# Altium PCB PCB_RX.PcbDoc
Units mm, origin at the board's own origin, x right, y up, seen from the top; angles counter-clockwise.
Board outline 85 x 54.6 mm, 2 copper layers (Top Layer, Bottom Layer); 68 components, 39 nets, 246 pads, 93 vias.
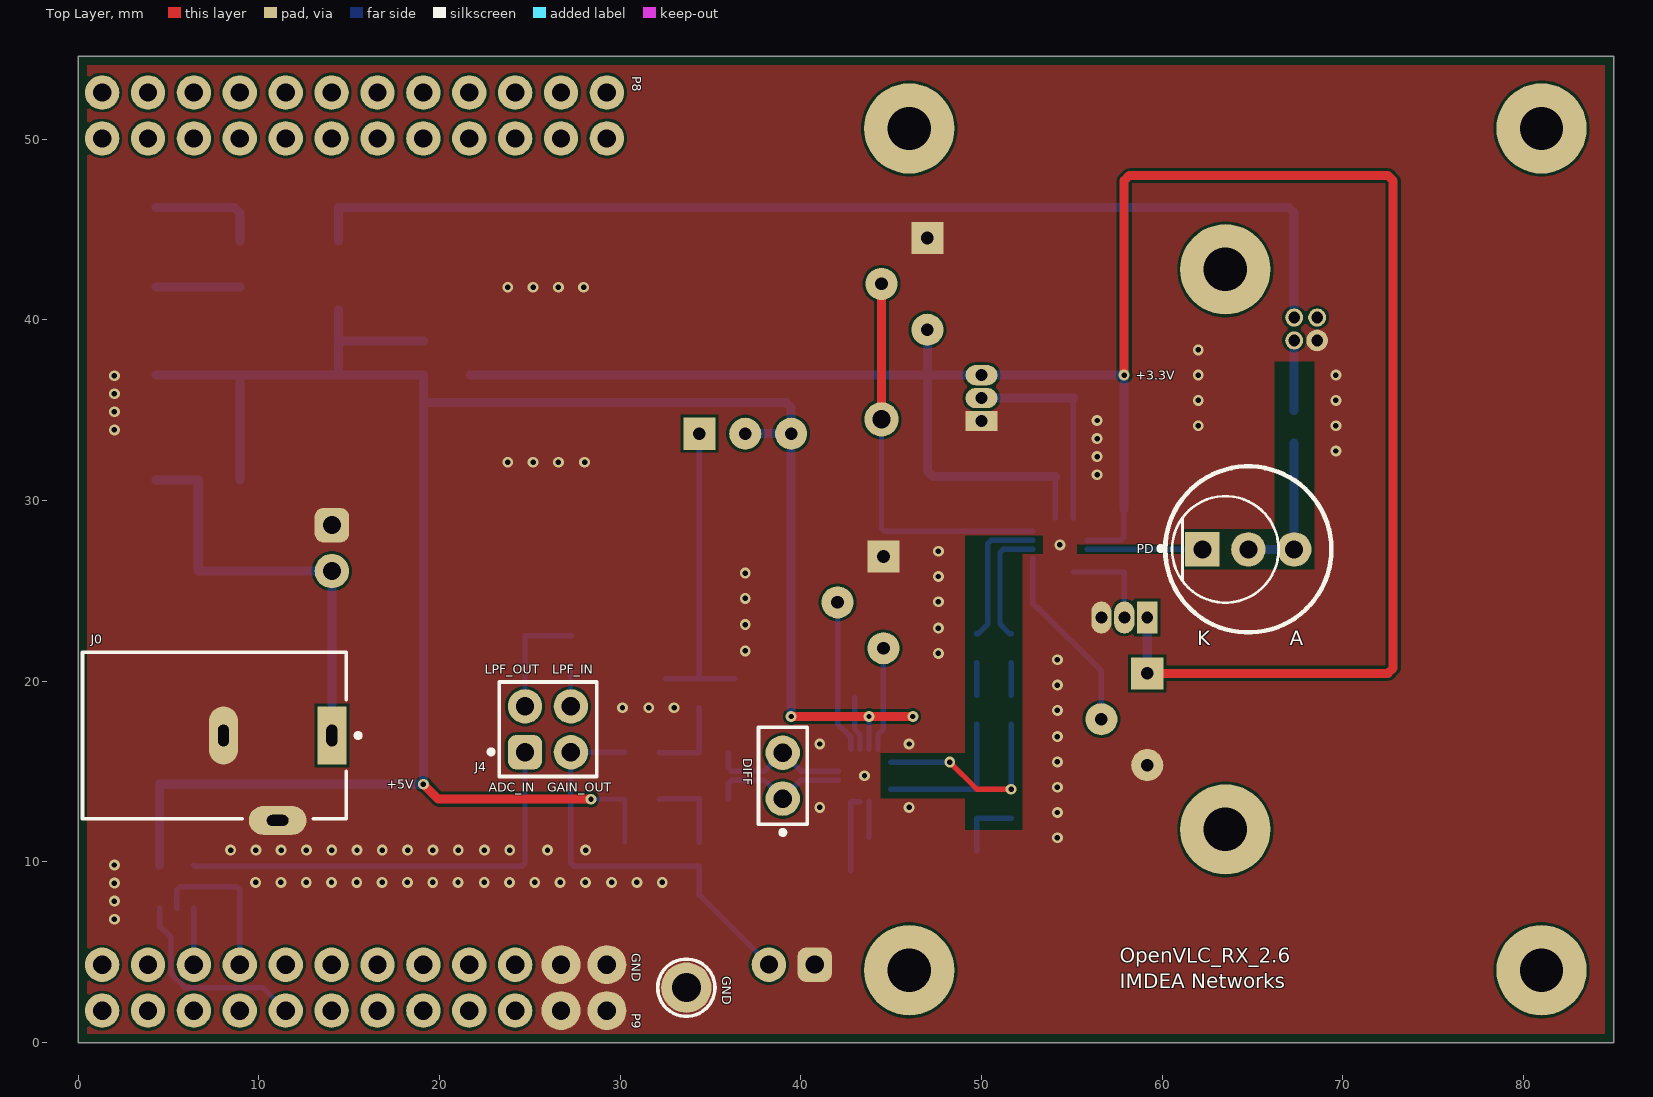
[diagram p0: Top Layer view]
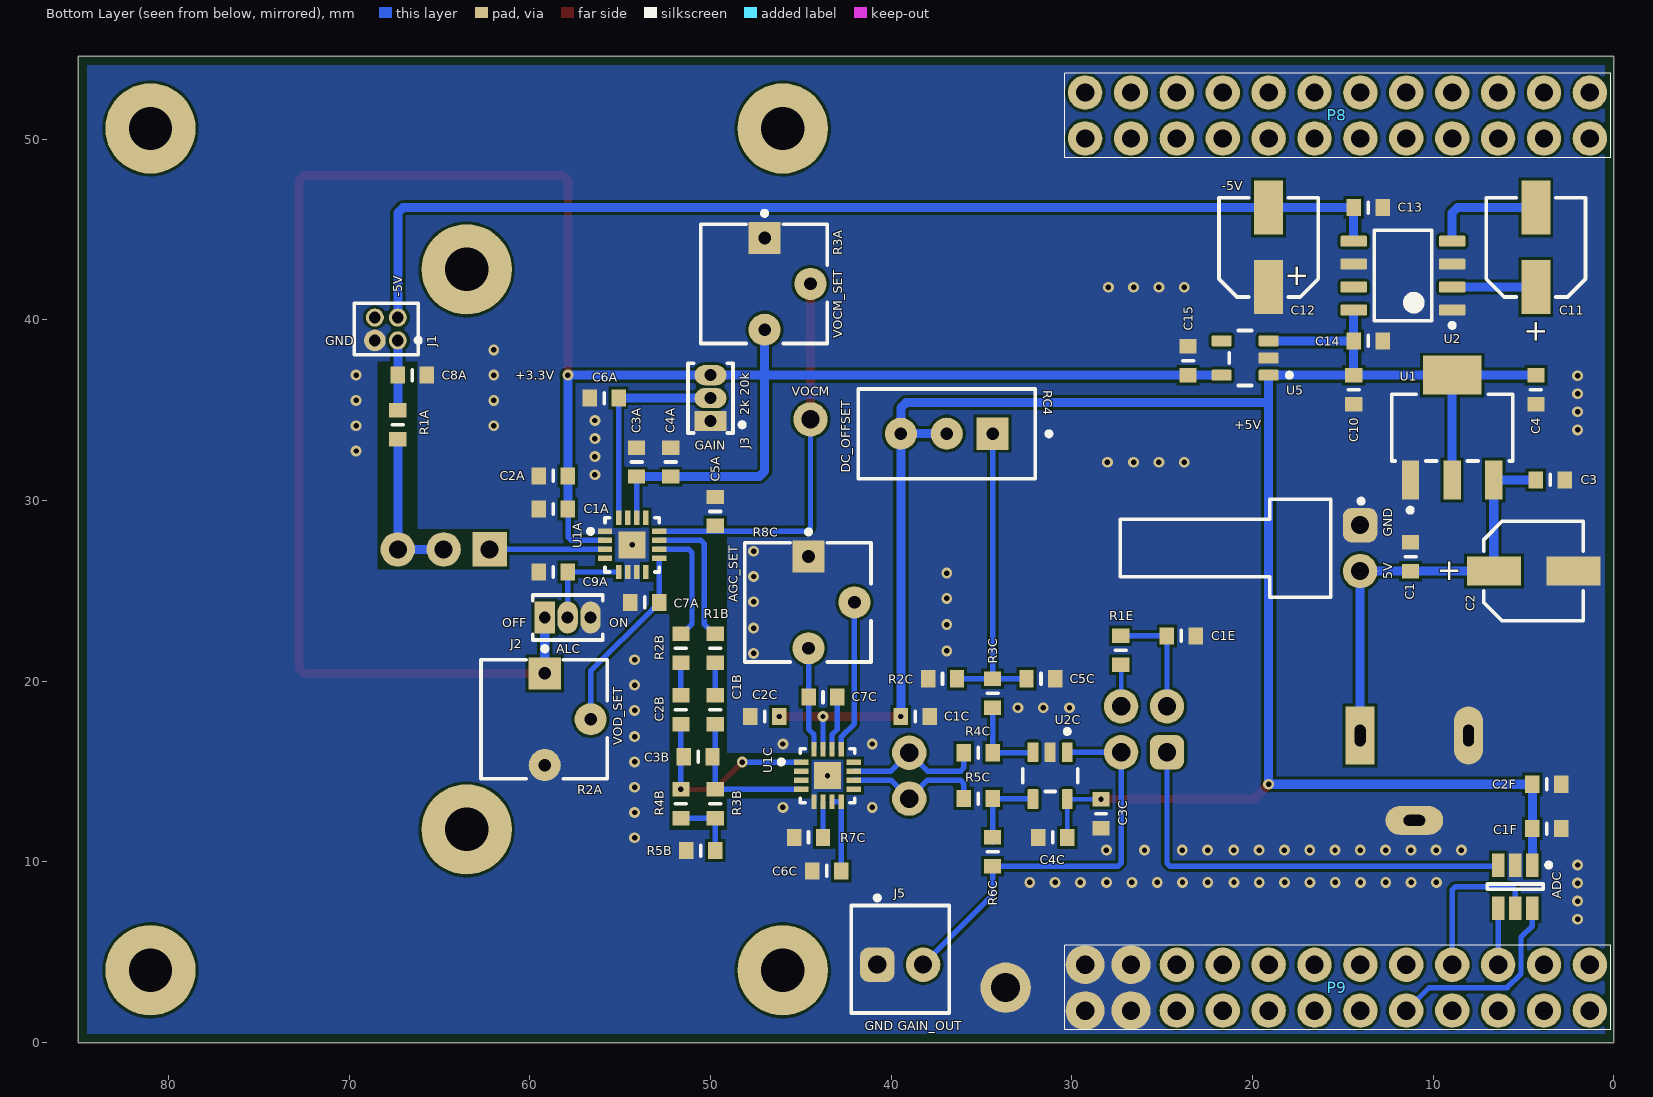
[diagram p1: Bottom Layer view, seen from below]
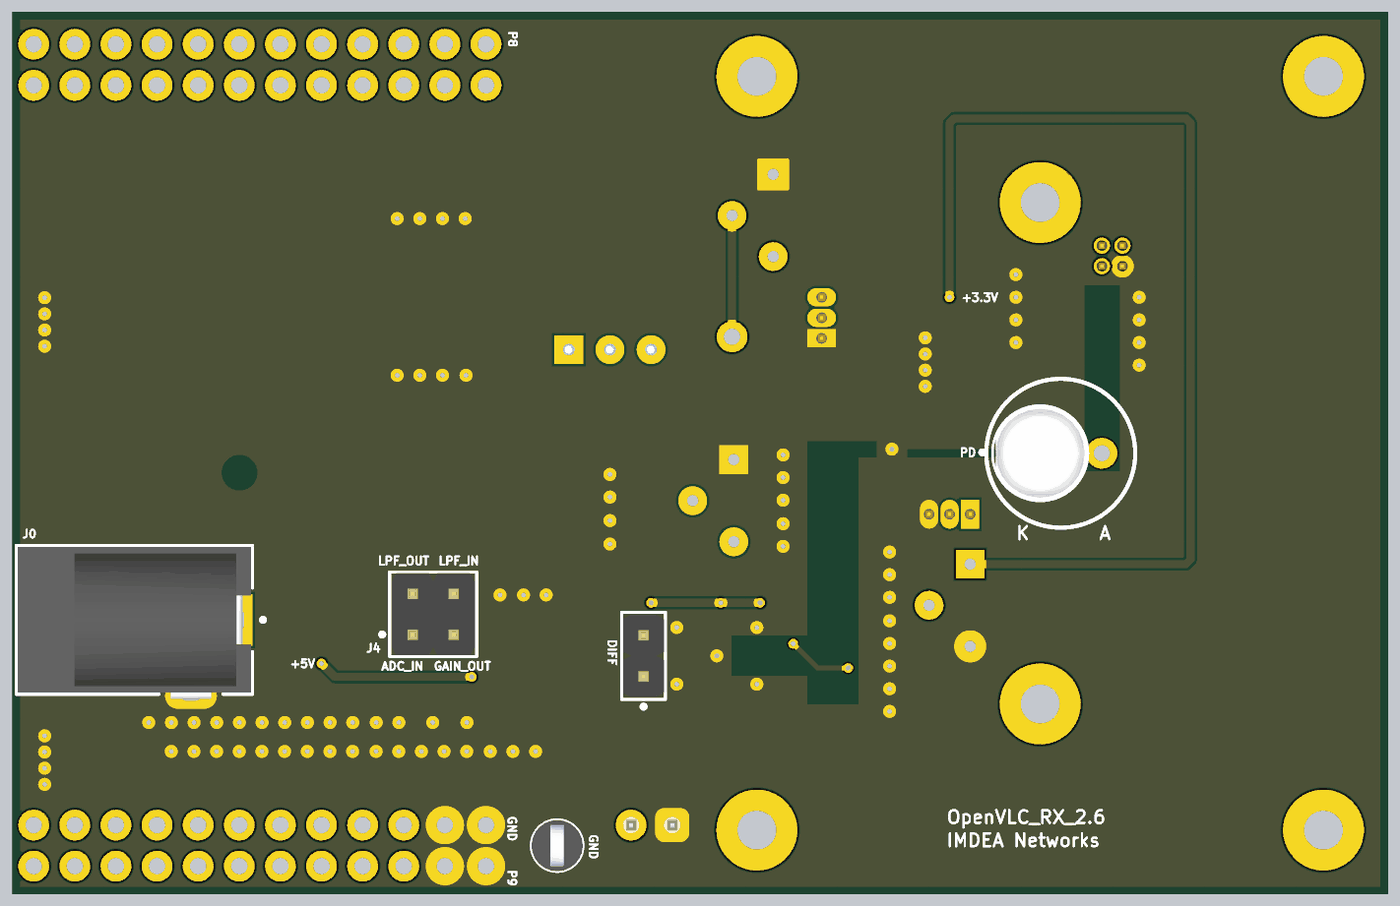
[diagram p2: 3D render of the assembled board from above, using the file's embedded part models]

## Layer stack, top to bottom
Top Solder: solder mask 0.0102, Solder Resist, Dk 3.5
Top Layer: signal copper 0.0356
Dielectric1: dielectric 0.32, FR-4, Dk 4.8
Bottom Layer: signal copper 0.0356
Bottom Solder: solder mask 0.0102, Solder Resist, Dk 3.5

## Board outline
0,0 85,0 85,54.6 0,54.6

## Design rules (kind name [scope] priority, off if disabled: settings)
Clearance Clearance_1 [(InNet('GND') AND InComponent('DC-DC'))] p1: gap=0.5 ignorepadtopadclearanceinfootprint=FALSE except(0: Arc-Hole Track-Hole SMDPad-Hole THPad-Hole Via-Hole Fill-Hole Poly-Hole Region-Hole Text-Hole)
Clearance [All] p2: gap=0.15 ignorepadtopadclearanceinfootprint=FALSE except(0: Arc-Hole Track-Hole SMDPad-Hole THPad-Hole Via-Hole Fill-Hole Poly-Hole Region-Hole Text-Hole)
DiffPairsRouting [All] p1: maxlimit=0.5 minlimit=0.2 mostfreqgap=0.2 toplayer_minwidth=0.127 toplayer_maxwidth=0.3 toplayer_prefwidth=0.127 bottomlayer_minwidth=0.127 bottomlayer_maxwidth=0.3 bottomlayer_prefwidth=0.127 impedanceprofiledriven=TRUE impedanceprofileid={C9FF6727-0311-42C7-A47E-204A0AB31086} impedanceprofilevalue=130.000000 maxuncoupledlength=12.7
HoleSize [All] p1: absolutevalues=TRUE maxlimit=2.54 minlimit=0.25 maxpercent=80.000 minpercent=20.000
MinimumSolderMaskSliver [All] p1: minsoldermaskwidth=0.15
PlaneConnect [All] p1: planeconnectstyle=Direct reliefexpansion=0.508 reliefentries=4 reliefconductorwidth=0.254 reliefairgap=0.254
PolygonConnect PolygonConnect_1 [IsVia & InNet('GND')] p1: connectstyle=Direct reliefconductorwidth=0.254 reliefentries=4 polygonreliefangle="90 Angle" airgapwidth=0
PolygonConnect [All] p2: connectstyle=Direct reliefconductorwidth=0.254 reliefentries=4 polygonreliefangle="90 Angle" airgapwidth=0.254
RoutingVias [All] p1: holewidth=0.711 width=1.27 viastyle="Through Hole" minholewidth=25 minwidth=0.55 maxholewidth=0.711 maxwidth=1.27
SMDNeckDown [All] p1: percent=80.000
SilkToSilkClearance [All] p1: silktosilkclearance=0.15
SilkToSolderMaskClearance [IsPad] p1: minsilkscreentomaskgap=0.15 clearancetoexposedcopper=TRUE
SolderMaskExpansion [All] p1: expansion=0.102 istentingtop=FALSE
SupplyNets "Schematic Supply Nets_2" [InNet('+3.3V')] p1: voltage=0.000
SupplyNets "Schematic Supply Nets_6" [InNet('-5V')] p2: voltage=0.000
SupplyNets "Schematic Supply Nets_3" [InNet('+5V')] p3: voltage=0.000
SupplyNets "Schematic Supply Nets_1" [InNet('VCC')] p4: voltage=0.000
SupplyNets "Schematic Supply Nets" [InNet('GND')] p5: voltage=0.000
Width [All] p1: maxlimit=1 minlimit=0.15 preferedwidth=0.3 minimp=50.000000 maximp=50.000000 favimp=50.000000
24 further rules are at their usual default settings.

## Classes and differential pairs
differential pair LNA: +LNA_P -LNA_N
differential pair BPF: +BPF_P -BPF_N
differential pair AGC: +AGC_P -AGC_N

## Components (designator, comment, footprint, x,y, rotation, side; value= is the part's Value field where it differs from the comment)
5V "61900211021" 61900211021 -1248.51,-1242.629 r270 bottom
ADC "ADS7886SBDBVR" TI-DBV6_M 5.455,8.629 r270 bottom
C1 "Cap" RESC1608X55N 11.245,26.901 r90 bottom value=10uF
C1A "Cap" RESC1608X55N 58.696,29.537 r0 bottom value=1000pF
C1B "Cap" RESC1608X55N 49.739,18.424 r270 bottom value=120nF
C1C "Cap" RESC1608X55N 38.663,18.05 r180 bottom value=1000pF
C1E "Cap" RESC1608X55N 23.933,22.511 r180 bottom value=620pF
C1F "Cap" RESC1608X55N 3.705,11.847 r180 bottom value=100nF
C2 "47uF" WCAP-PSLP_D5H5.5 4.438,26.101 r0 bottom
C2A "Cap" RESC1608X55N 58.696,31.367 r0 bottom value=100nF
C2B "Cap" RESC1608X55N 51.639,18.424 r270 bottom value=120nF
C2C "Cap" RESC1608X55N 47,18.05 r0 bottom value=100nF
C2F "Cap" RESC1608X55N 3.705,14.3 r180 bottom value=2.2uF
C3 "Cap" RESC1608X55N 3.515,31.145 r0 bottom value=2.2uF
C3A "Cap" RESC1608X55N 54.09,32.135 r90 bottom value=1000pF
C3B "Cap" RESC1608X55N 50.689,15.824 r180 bottom value=330pF
C3C "Cap" RESC1608X55N 28.384,12.674 r270 bottom value=1000pF
C4 "Cap" RESC1608X55N 4.315,36.145 r90 bottom value=10uF
C4A "Cap" RESC1608X55N 52.2,32.135 r90 bottom value=100nF
C4C "Cap" RESC1608X55N 31.05,11.359 r0 bottom value=100nF
C5A "Cap" RESC1608X55N 49.739,29.4 r270 bottom value=100nF
C5C "Cap" RESC1608X55N 31.708,20.138 r0 bottom value=2.2uF
C6A "Cap" RESC1608X55N 55.89,35.675 r0 bottom value=100nF
C6C "Cap" RESC1608X55N 43.573,9.5 r180 bottom value=2.2uF
C7A "Cap" RESC1608X55N 53.64,24.367 r0 bottom value=100nF
C7C "Cap" RESC1608X55N 43.773,19.124 r0 bottom value=2.2uF
C8A "Cap" RESC1608X55N 66.51,36.945 r0 bottom value=100nF
C9A "Cap" RESC1608X55N 58.696,26.05 r0 bottom value=100nF
C10 "Cap" RESC1608X55N 14.395,36.145 r90 bottom value=2.2uF
C11 "47uF" WCAP-PSLP_D5H5.5 4.315,44.023 r270 bottom
C12 "47uF" WCAP-PSLP_D5H5.5 19.105,44.023 r270 bottom
C13 "Cap" RESC1608X55N 13.595,46.223 r0 bottom value=10uF
C14 "GRM188R6YA475KE15D" RESC1608X55N 13.595,38.841 r0 bottom value=2.2uF
C15 "GRM188R6YA106MA73D" RESC1608X55N 23.561,37.745 r270 bottom value=10uF
DIFF "61300211121" 61300211121 39,14.774 r90 top
GND "5011" KSTN-5011_V 33.662,3.041 r270 top
J0 "PJ-102A" FP-PJ-102A-MFG 7.54,17 r90 top
J1 "62200421121" 62200421121 67.945,39.5 r90 bottom
J2 "GRPB031VWVN-RC" FP-TMS-103-02-G-S-MFG 57.906,23.53 r180 bottom
J3 "61300311121" FP-TMS-103-02-G-S-MFG 50,35.675 r90 bottom
J4 "61300421121" 61300421121 26.003,17.344 r0 top
J5 "61900211121" 61900211121 39.5,4.611 r0 bottom
P8 "61302421121" BBB_CAPE_NO_HEADER_R_24#1 57.205,50.049 r0 bottom
P9 "61302421121" BBB_CAPE_NO_HEADER_R_24#2 57.205,1.771 r0 bottom
PD "SFH213" FP-SFH213-0 63.5,27.3 r0 top
R1A "Res1" RESC1608X55N 67.31,34.2 r90 bottom value=2k
R1B "Res1" RESC1608X55N 49.739,21.824 r90 bottom value=130
R1E "Res1" RESC1608X55N 27.294,21.711 r270 bottom value=130
R2A "10k" BOUR-3362P#1 59.211,17.9 r270 bottom
R2B "Res1" RESC1608X55N 51.639,21.824 r90 bottom value=130
R2C "Res1" RESC1608X55N 37.156,20.138 r0 bottom value=130
R3A "10k" BOUR-3362P#1 47.041,42 r270 bottom
R3B "500" RESC1608X55N 49.739,13.224 r270 bottom value=130
R3C "Res1" RESC1608X55N 34.383,19.338 r90 bottom value=130
R4B "Res1" RESC1608X55N 51.639,13.224 r90 bottom value=130
R4C "Res1" RESC1608X55N 35.183,16.044 r0 bottom value=130
R5B "Res1" RESC1608X55N 50.539,10.624 r180 bottom value=1M
R5C "Res1" RESC1608X55N 35.183,13.504 r0 bottom value=130
R6C "Res1" RESC1608X55N 34.383,10.559 r90 bottom value=130
R7C "Res1" RESC1608X55N 44.573,11.359 r180 bottom value=10k
R8C "10k" BOUR-3362P#2 44.609,24.367 r270 bottom
RC4 "500" FP-3296W-MFG 36.923,33.7 r180 bottom value=500kΩ
U1 "TLV76150DCYR" FP-DCY0004A-MFG 8.945,34.045 r90 bottom
U1A "LMH32401IRGTR" QFN50P300X300X100-17N-D 54.34,27.55 r180 bottom
U1C "AD8338ACPZ-R7" FP-CP-16-22-IPC_A 43.523,14.774 r180 bottom
U2 "LM2663M/NOPB" D0008A_N 11.67,42.458 r0 bottom
U2C "OPA863ADBVR" FP-DBV0005A-MFG 31.2,14.774 r270 bottom
U5 "TPS7A2433DBVR" FP-DBV0005A-MFG 20.405,37.895 r0 bottom

## Footprints (in the part's own frame and the unit in brackets; to place one, negate y for a bottom-side part, rotate by r counter-clockwise, add the part's x,y. Pads: shape width x height; smd on the part's side, far side on the other; paste and mask are expansions set on the pad)
61300211121 [mil] "Pin Header, pitch 2.54 mm, THT, Vertical, single row, 2p"
  round 75 hole 40: 1(-50,0) 2(50,0)
  silkscreen extent -129,-53 106,53, body extent -100,-50 100,50, height 337
61300421121 [mil] "Pin Header, pitch 2.54 mm, THT, Vertical, dual row, 4p"
  rrect50% 75x75 hole 40: 1(-50,-50)
  round 75 hole 40: 2(-50,50) 3(50,-50) 4(50,50)
  silkscreen extent -129,-103 106,103, body extent -100,-100 100,100, height 338
61900211021 [mm] "2.54mm Male Left Angled Header Bottom Locking, 2p"
  rrect50% 1.905x1.905 hole 1: 1(-1271.27,-1262.55)
  round 1.905 hole 1: 2(-1268.73,-1262.55)
  silkscreen extent -1272.72,-1275.82 -1267.29,-1262.38, body extent -1272.54,-1275.75 -1267.46,-1262.23, height 5.83
61900211121 [mm] "2.54mm Male Locking Header, 2p"
  rrect50% 1.905x1.905 hole 1: 1(1.27,0.3)
  round 1.905 hole 1: 2(-1.27,0.3)
  silkscreen extent -2.71,-3.52 2.71,2.98, body extent -2.54,-2.9 2.54,2.9, height 11.53
62200421121 [mm] "Pin Header, pitch 1.27 mm, THT, Vertical, dual row, 4p"
  round 1 hole 0.65: 1(-0.635,-0.635) 3(0.635,-0.635) 4(0.635,0.635)
  round 1.2 hole 0.65: 2(-0.635,0.635)
  silkscreen extent -1.42,-1.89 1.42,1.78, body extent -1.27,-1.7 1.27,1.7, height 5.33
BBB_CAPE_NO_HEADER_R_24#1 [mil] "46-pin male header for BeagleBone Black P8,P9"
  round 75 hole 40: 23(-1100,0) 24(-1100,-100) 25(-1200,0) 26(-1200,-100) 27(-1300,0) 28(-1300,-100) 29(-1400,0) 30(-1400,-100) 31(-1500,0) 32(-1500,-100) 33(-1600,0) 34(-1600,-100) 35(-1700,0) 36(-1700,-100) 37(-1800,0) 38(-1800,-100) 39(-1900,0) 40(-1900,-100) 41(-2000,0) 42(-2000,-100) 43(-2100,0) 44(-2100,-100) 45(-2200,0) 46(-2200,-100)
  silkscreen extent -2246,-142 -1056,42
BBB_CAPE_NO_HEADER_R_24#2 [mil] "46-pin male header for BeagleBone Black P8,P9"
  round 85 hole 40: 23(-1100,0) 24(-1100,-100) 25(-1200,0) 26(-1200,-100)
  round 75 hole 40: 27(-1300,0) 28(-1300,-100) 29(-1400,0) 30(-1400,-100) 31(-1500,0) 32(-1500,-100) 33(-1600,0) 34(-1600,-100) 35(-1700,0) 36(-1700,-100) 37(-1800,0) 38(-1800,-100) 39(-1900,0) 40(-1900,-100) 41(-2000,0) 42(-2000,-100) 43(-2100,0) 44(-2100,-100) 45(-2200,0) 46(-2200,-100)
  silkscreen extent -2246,-142 -1056,42
BOUR-3362P#1 [mm] "THD, 3-Leads, Body 6.6x6.99mm, Pitch 2.54mm"
  rect 1.778x1.778 hole 0.7: 1(-2.54,0.035)
  round 1.778 hole 0.7: 2(0,2.575) 3(2.54,0.035)
  silkscreen extent -4.02,-3.49 3.3,3.5, body extent -3.3,-3.49 3.3,3.49, height 4.95
BOUR-3362P#2 [mm] "THD, 3-Leads, Body 6.6x6.99mm, Pitch 2.54mm"
  rect 1.778x1.778 hole 0.7 paste-2539.97 mask+0: 1(-2.54,0.035)
  round 1.778 hole 0.7 paste-2539.97 mask+0: 2(0,2.575) 3(2.54,0.035)
  silkscreen extent -4.02,-3.49 3.3,3.5, body extent -3.3,-3.49 3.3,3.49, height 4.95
D0008A_N [mm] "SOIC, 8-Leads, Body 5x4mm, Pitch 1.27mm, IPC Medium Density"
  rrect17% 1.45x0.6 smd: 1(-2.725,1.905) 2(-2.725,0.635) 3(-2.725,-0.635) 4(-2.725,-1.905) 5(2.725,-1.905) 6(2.725,-0.635) 7(2.725,0.635) 8(2.725,1.905)
  silkscreen extent -2.85,-2.5 1.6,2.88, body extent -3,-2.45 3,2.45, height 1.63
FP-3296W-MFG [mm]
  rect 1.778x1.778 hole 0.7 paste-2539.97 mask+0: 1(2.54,0.005)
  round 1.778 hole 0.7 paste-2539.97 mask+0: 2(0,0.005) 3(-2.54,0.005)
  silkscreen extent -4.89,-2.48 5.77,2.48, body extent -4.74,-2.41 4.79,2.42, height 12.03
FP-CP-16-22-IPC_A [mm]
  rect 0.8x0.3 smd paste+0 mask+0.102: 1(-1.453,0.75) 2(-1.453,0.25) 3(-1.453,-0.25) 4(-1.453,-0.75) 9(1.453,-0.75) 10(1.453,-0.25) 11(1.453,0.25) 12(1.453,0.75)
  rect 0.3x0.8 smd paste+0 mask+0.102: 5(-0.75,-1.453) 6(-0.25,-1.453) 7(0.25,-1.453) 8(0.75,-1.453) 13(0.75,1.453) 14(0.25,1.453) 15(-0.25,1.453) 16(-0.75,1.453)
  rect 1.5x1.5 smd paste+0 mask+0.102: 17(0,0)
  silkscreen extent -2.68,-1.5 1.5,1.5, body extent -1.5,-1.5 1.5,1.5, height 0.8
FP-DBV0005A-MFG [mm]
  rrect17% 1.1x0.6 smd paste+0 mask+0: 1(-1.3,0.95) 2(-1.3,0) 3(-1.3,-0.95) 4(1.3,-0.95) 5(1.3,0.95)
  silkscreen extent -2.57,-1.53 0.87,1.53, body extent -1.4,-1.45 1.4,1.45, height 1.45
FP-DCY0004A-MFG [mm]
  rect 2.15x0.95 smd paste+0 mask+0: 1(-2.9,2.3) 2(-2.9,0) 3(-2.9,-2.3)
  rect 2.15x3.25 smd paste+0 mask+0: 4(2.9,0)
  silkscreen extent -4.7,-3.35 1.85,3.35, body extent -3.5,-3.25 3.5,3.25, height 1.8
FP-PJ-102A-MFG [mm]
  rect 3.2x1.6 hole 0.6 slot 1.2 at 0 deg paste-2539.97 mask+0: 1(0,-6.5)
  rrect100% 3.2x1.6 hole 0.6 slot 1.2 at 0 deg paste-2539.97 mask+0: 2(0,-0.5)
  oval 1.6x3.2 hole 0.6 slot 1.2 at 90 deg paste-2539.97 mask+0: 3(-4.7,-3.5)
  silkscreen extent -4.6,-8.08 4.6,7.3, body extent -5.6,-7.4 4.7,7.4, height 0.25
FP-SFH213-0 [mm]
  rect 1.905x1.905 hole 1 paste-2539.97 mask+0: 1(-1.27,0)
  round 1.905 hole 1 paste-2539.97 mask+0: 2(1.27,0)
  silkscreen extent -3.7,-2.95 2.95,2.95, body extent -3.05,-3.05 3.05,3.05, height 0.25
FP-TMS-103-02-G-S-MFG [mm]
  rect 1.12x1.778 hole 0.66 paste-2539.97 mask+0: 1(-1.27,0)
  oval 1.12x1.778 hole 0.66 paste-2539.97 mask+0: 2(0,0) 3(1.27,0)
  silkscreen extent -1.93,-1.85 1.93,1.24, body extent -1.91,-1.22 1.91,1.22, height 5.33
KSTN-5011_V [mil] "Test Point, Dia 3.17mm"
  round 110 hole 62.99: 1(0,0)
  silkscreen extent -62,-62 62,62, body extent -62,-62 63,63, height 320
QFN50P300X300X100-17N-D [mm]
  rect 0.8x0.3 smd: 1(-1.5,0.75) 2(-1.5,0.25) 3(-1.5,-0.25) 4(-1.5,-0.75) 9(1.5,-0.75) 10(1.5,-0.25) 11(1.5,0.25) 12(1.5,0.75)
  rect 0.3x0.8 smd: 5(-0.75,-1.5) 6(-0.25,-1.5) 7(0.25,-1.5) 8(0.75,-1.5) 13(0.75,1.5) 14(0.25,1.5) 15(-0.25,1.5) 16(-0.75,1.5)
  rect 1.5x1.5 smd: 17(0,0)
  silkscreen extent -2.43,-1.5 1.5,1.5
RESC1608X55N [mm]
  rect 0.8x0.95 smd: 1(-0.8,0) 2(0.8,0)
  silkscreen extent 0,-0.3 0,0.3
TI-DBV6_M [mm] "SOT23, 6-Leads, Body 2.9x1.6mm, Pitch 0.95mm, IPC Low Density"
  rect 1.3x0.7 smd: 1(-1.2,0.95) 2(-1.2,0) 3(-1.2,-0.95) 4(1.2,-0.95) 5(1.2,0) 6(1.2,0.95)
  silkscreen extent -1.32,-1.55 0.15,1.97, body extent -0.87,-1.52 0.87,1.53, height 1.45
WCAP-PSLP_D5H5.5 [mm] "Aluminum Polymer Capacitors, body diameter 5mm"
  rect 3x1.6 smd: 1(2.2,0) 2(-2.2,0)
  silkscreen extent -2.75,-2.75 2.75,2.75, body extent -3,-2.65 3,2.65, height 5.5

## Part data
5V: library part CMP-1502-00592-2, Color=Beige, Contact Resistance=20mΩ, Current Rating=3A, Flammability Rating="UL94 V-0", Insulation Resistance=1GΩ, Max Operating Temperature=105°C, Min Operating Temperature=-40°C, Operating Supply Voltage=250V, Connector Type="Male Pin", Contact Gender=Male, Contact Material=Copper, Contact Mating Length=7.62mm, Contact Plating=Tin, Fastening Type=Friction, Gender=Male, Height=3.2mm, Housing Material=Nylon, Insulation=Insulated, Lead Pitch=2.54mm, Length=5.08mm, Mount="Through Hole", NexarPartId=18818217, Number of Contacts=2, Number of Pins=2, Number of Positions=2, Number of Rows=1, Packaging=Bulk, Pitch=2.54mm, REACH SVHC=Unknown, RoHS=Compliant, Termination="Through Hole", Voltage Rating=250V, Width=5.12mm
ADC: library part CMP-0003-00246-2, "2.35 to 5.25 V, 12-Bit, 1 MSPS, Serial ADC, -40 to 125 degC, 6-pin SOT23 (DBV6), Green (RoHS & no Sb/Br)", Analog Voltage AV/DD(Max)(V)=5.25, Analog Voltage AV/DD(Min)(V)=2.35, Manufacturer="Texas Instruments", # Input Channels=1, Architecture=SAR, Code_JEDEC=MO-178, ComponentLink1Description="Manufacturer URL", ComponentLink1URL=http://www.ti.com/, ComponentLink2Description=Datasheet, ComponentLink2URL=http://www.ti.com/general/docs/lit/getliterature.tsp?genericPartNumber=ADS7886&fileType=pdf, ComponentLink3Description="Package Specification", ComponentLink3URL=http://www.ti.com/litv/pdf/mpds026h, DatasheetVersion=SLAS492A, Digital Supply(Max)(V)=5.25, Digital Supply(Min)(V)=2.35, Eco-Plan="Green (RoHS & no Sb/Br)", INL(Max)(+/-LSB)=1.25, Interface="Serial SPI", Mounting Technology="Surface Mount", PackageDescription="6-Pin Plastic Small Outline, Body 1.6 x 2.9 mm, Pitch 0.95 mm", PackageReference=DBV6, PackageVersion="4073253-5/K, 03/2006", PartNumber=ADS7886SBDBVR, Resolution(Bits)=12, Sample Rate (max)(SPS)=1M, SFDR(dB)=85.5, SINAD(dB)=71.25, SNR(dB)=71.25, SubFamily="Precision ADC (<=10MSPS)"
C1 C1A C1B C1C C1E C1F C2A C2B C2C C2F C3 C3A C3B C3C C4 C4A C4C C5A C5C C6A C6C C7A C7C C8A C9A C10 C13: "Capacitor", LatestRevisionDate=17-Jul-2002, LatestRevisionNote="Re-released for DXP Platform.", PackageDescription="Radial Cap, Thru-Hole; 2 Leads; 0.3 in Pin Spacing", PackageReference=RAD-0.3, Published=8-Jun-2000, Publisher="Altium Limited"
C2 C11 C12: library part CMP-03913-53758736-1, "875105242006 WCAP-PSLP Aluminum Polymer Capacitors", Capacitance=47µF, Case/Package=Radial, ESR (Equivalent Series Resistance)=30mΩ, Leakage Current=300µA, Max Operating Temperature=105°C, Min Operating Temperature=-55°C, Ripple Current=1.97A, Tolerance=20%, Voltage Rating=10V, Diameter=5mm, Height - Seated (Max)=5.5118mm, Length=5.5mm, Life (Hours)=2000hours, Mount="Surface Mount", NexarPartId=53758736, Packaging="Tape & Reel (TR)", Pitch=5.3mm, Polarity=Polar, REACH SVHC=Unknown, RoHS=Compliant, Voltage Rating (DC)=10V
C14 C15: library part Cap, "Capacitor", LatestRevisionDate=17-Jul-2002, LatestRevisionNote="Re-released for DXP Platform.", PackageDescription="Radial Cap, Thru-Hole; 2 Leads; 0.3 in Pin Spacing", PackageReference=RAD-0.3, Published=8-Jun-2000, Publisher="Altium Limited"
DIFF: library part CMP-1712-00002-6, Color=Black, Contact Resistance=20mΩ, Current Rating=3A, Max Operating Temperature=125°C, Min Operating Temperature=-40°C, Operating Supply Voltage=250V, Connector Type="Male Pin", Contact Gender=Male, Contact Material=Copper, Contact Mating Length=5.9944mm, Contact Plating=Gold, Gender=Male, Height=8.94mm, Housing Material=PBT, Lead Free="Lead Free", Lead Pitch=2.54mm, Mount="Through Hole", NexarPartId=20081794, Number of Contacts=2, Number of Pins=2, Number of Positions=2, Number of Rows=1, Orientation=Vertical, Packaging=Bulk, Pitch=2.54mm, REACH SVHC="No SVHC", RoHS=Compliant, Termination="Through Hole", Voltage Rating=250V
GND: library part CMP-1672-00003-4, "Test Point, Black, Through Hole, RoHS, Bulk", Colour=Black, Manufacturer=Keystone, Package Quantity=100, ComponentLink1Description="Manufacturer URL", ComponentLink1URL=http://www.keyelco.com/, ComponentLink2Description=Datasheet, ComponentLink2URL=http://www.keyelco.com/product-pdf.cfm?p=1320, Contact Material=Bronze, Contact Plating=Silver, DatasheetVersion="Rev. F, 12/2013", Height="8.12 mm", Mount="Through Hole", Mounting Technology="Through Hole", PackageDescription="1-Pin Through Hole Device, Dia 3.17 mm", PackageReference=5011, Packaging=Bulk, Pins=1, REACH SVHC="No SVHC", RoHSCompliant=true
J0: library part CMP-12637-106234071-1, "PJ-102A 2.0 x 6.5 mm, 2.5 A, Horizontal, Through Hole, Tapered Pins, Dc Power Jack Connector", Color=Black, Current Rating=2.5A, Flammability Rating="UL94 V-0", Insulation Resistance=50MΩ, Max Operating Temperature=85°C, Min Operating Temperature=-25°C, Voltage Rating=24V, Contact Gender=Male, Contact Material="Copper, Nickel, Tin", Contact Plating=Nickel, Diameter=2.1mm, Gender=Male, Height=11.2mm, Housing Color=Black, Housing Material=Thermoplastic, Inside Diameter=2mm, Lead Free="Lead Free", Lifecycle Status=Production, Mount="Through Hole", NexarPartId=106234071, Number of Conductors=2, Number of Contacts=3, Orientation=Horizontal, Outside Diameter=6.5mm, Packaging=Bulk, RoHS=Compliant, Schedule B="8536695050, 8536695050", Shielding=No, Termination="Through Hole", Voltage Rating (DC)=24V
J1: library part CMP-1502-00946-3, Color=Black, Contact Resistance=20mΩ, Current Rating=1A, Operating Supply Voltage=100V, Connector Type="Male Pin", Contact Material=Copper, Contact Mating Length=3.81mm, Contact Plating=Gold, Gender=Male, Lead Pitch=1.27mm, Mount="Through Hole", NexarPartId=32855584, Number of Contacts=4, Number of Pins=4, Number of Positions=4, Number of Rows=2, Orientation=Vertical, Packaging=Box, Pitch=1.27mm, REACH SVHC=Unknown, RoHS=Compliant, Row Spacing=1.27mm, Termination=Solder
J2 J3: library part CMP-02766-001782-1, "CONN HEADER VERT 3POS 1.27MM", Flammability Rating="UL94 V-0", Housing Color=Black, Max Current Rating=1A, Max Operating Temperature=125°C, Min Operating Temperature=-55°C, Connector Type=Header, Contact Finish - Mating=GOLD, Contact Material=Bronze, Contact Plating=Gold, Contact Shape=Square, Contact Type="Male Pin", Depth=2.48mm, Fastening Type=Pull, Gender=Male, Housing Material=Polymer, Insulation Color=Black, Insulation Material=Polymer, Length=3.81mm, Number of Contacts=3, Number of Positions=3, Number of Rows=1, Orientation=Straight, Packaging=Bulk, Pitch=1.27mm, Radiation Hardening=No, Reach SVHC Compliant=Yes, RoHS Compliant=Yes, Series=TMS, Termination=Solder
J4: library part CMP-1502-01066-4, Color=Black, Contact Resistance=20mΩ, Current Rating=3A, Max Operating Temperature=105°C, Min Operating Temperature=-40°C, Operating Supply Voltage=250V, Connector Type="Male Pin", Contact Material=Copper, Contact Mating Length=5.9944mm, Contact Plating=Gold, Gender=Male, Height=8.89mm, Lead Free="Lead Free", Lead Pitch=2.54mm, Mount="Through Hole", NexarPartId=32855524, Number of Contacts=4, Number of Pins=4, Number of Positions=4, Number of Rows=2, Orientation=Vertical, Packaging=Bulk, Pitch=2.54mm, REACH SVHC=Unknown, RoHS=Compliant, Row Spacing=2.54mm, Termination=Solder, Voltage Rating=250V
J5: library part CMP-1502-00584-3, Color=Beige, Contact Resistance=20mΩ, Current Rating=3A, Flammability Rating="UL94 V-0", Insulation Resistance=1GΩ, Max Operating Temperature=105°C, Min Operating Temperature=-40°C, Operating Supply Voltage=250V, Connector Type="Male Pin", Contact Gender=Male, Contact Material=Copper, Contact Mating Length=7.493mm, Contact Plating=Tin, Fastening Type=Friction, Gender=Male, Height=11.75mm, Housing Material=Nylon, Lead Pitch=2.54mm, Length=5.08mm, Mount="Through Hole", NexarPartId=18818218, Number of Contacts=2, Number of Pins=2, Number of Positions=2, Number of Rows=1, Orientation=Vertical, Packaging=Bulk, Pitch=2.54mm, REACH SVHC=Unknown, RoHS=Compliant, Termination="Through Hole", Voltage Rating=250V, Width=5.12mm
P8: library part BBB_P8_reduced
P9: library part BBB_P9_reduced
PD: library part CMP-62027-000002-1, "SENSOR PHOTODIODE 850NM RADIAL", Dark Current=0.001uA, Forward Current=100mA, Forward Voltage=1.3V, Manufacturer=OSRAM, Power Dissipation=150mW, Reverse Breakdown Voltage=20V, Temperature="-40°C to +100°C", Temperature Range High=+100°C, Temperature Range Low=-40°C, Voltage=50V, Automotive=No, Category=Diode, ComponentLink2Description=Datasheet, ComponentLink2URL=https://dammedia.osram.info/media/resource/hires/osram-dam-5488355/SFH%20213_EN.pdf, Device Class L1=Sensors, Device Class L2="Optical Sensors", Device Class L3=Photodiodes, Digikey Description="SENSOR PHOTODIODE 850NM RADIAL", Ipc Land Pattern Name=CAPRD254W95D570H860, Lead Free=Yes, Manufacturer Part Number=SFH213, Mouser Description="Photodiode PIN Chip 850nm 0.62A/W Sensitivity 2-Pin T-1 3/4 T/R", Octopart=https://octopart.com/sfh+213-osram+opto-55410864, Package=SFH213, RoHS=TRUE, Sensor Output=Photodiode, Wavelength=400-1100nm
R1A R1B R1E R2B R2C R3C R4B R4C R5B R5C R6C R7C: "Resistor", LatestRevisionDate=17-Jul-2002, LatestRevisionNote="Re-released for DXP Platform.", PackageDescription="Axial Device, Thru-Hole; 2 Leads; 0.3 in Pin Spacing", PackageReference=AXIAL-0.3, Published=8-Jun-2000, Publisher="Altium Limited"
R2A R3A R8C: library part CMP-1747-00004-1, "Square Trimpot(R) Trimming Potentiometer, 10 KOhm, 300 V, -55 to 125 degC, 3-Pin THD, RoHS, Tube", Case Code (Imperial)=0612, Case Code (Metric)=1632, Case/Package=1206, Max Operating Temperature=125degC, Min Operating Temperature=-25degC, Package Quantity=5000, Power Rating="1 W", Resistance="50 mohm", Tolerance=1%, Voltage Rating="220 mV", ComponentLink1Description="Manufacturer URL", ComponentLink1URL=http://www.bourns.com/, ComponentLink2Description=Datasheet, ComponentLink2URL=http://www.bourns.com/docs/Product-Datasheets/3362.pdf, DatasheetVersion=May-16, Height="0.6 mm", Length="3.2 mm", Mount="Surface Mount", PackageDescription="3-Pin Through Hole Device, Body 6.6 x 6.99 mm, Pitch 2.54 mm", PackageReference=3326P, Packaging="Tape and Reel", Pins=2, REACH SVHC="No SVHC", RoHSCompliant=True, Width="1.6 mm"
R3B: library part Res1, "Resistor", LatestRevisionDate=17-Jul-2002, LatestRevisionNote="Re-released for DXP Platform.", PackageDescription="Axial Device, Thru-Hole; 2 Leads; 0.3 in Pin Spacing", PackageReference=AXIAL-0.3, Published=8-Jun-2000, Publisher="Altium Limited"
RC4: library part CMP-2000-05583-2, "TRIMMER 500K OHM 0.5W PC PIN TOP", Manufacturer=Bourns, Manufacturer Part Number=3296W-1-504LF, Package=3296W, Power Rating=0.5W, Resistance=500kΩ, Temperature="-55°C to +125°C", Temperature Coefficient=100ppm/°C, Temperature Range High=+125°C, Temperature Range Low=-55°C, Tolerance=10%, Voltage Rating=300V, Automotive=No, Category=Res, ComponentLink2Description=Datasheet, ComponentLink2URL=https://www.bourns.com/docs/Product-Datasheets/3296.pdf, Device Class L1="Passive Components", Device Class L2=Resistors, Device Class L3="Variable Resistors and Potentiometers", Digikey Description="TRIMMER 500K OHM 0.5W PC PIN TOP", Height=12.05mm, Lead Free=Yes, Mouser Description="Trimmer; Cermet; Rest 500 Kilohms; PCB; 25 Turns; Pwr-Rtg 0.5W", Octopart=https://octopart.com/3296w-1-504lf-bourns-143884, RoHS=TRUE, Series="Trimpot 3296-Sealed", Standoff Height=0.38mm
U1: library part CMP-00370-134324849-1, "TLV76150DCYR 1-A 16-V high-PSRR linear voltage regulator 4-SOT-223 -40 to 125", Case/Package=SOT-223, Dropout Voltage=900mV, Manufacturer Lifecycle Status=ACTIVE, Max Junction Temperature (Tj)=125°C, Max Supply Voltage=16V, Min Operating Temperature=-40°C, Min Supply Voltage=6.5V, Nominal Supply Current=65µA, Output Current=1A, Output Voltage=5V, Accuracy=1%, Height=1.8mm, Length=6.5mm, Lifecycle Status=Production, Max Operating Temperature=125°C, NexarPartId=134324849, Number of Channels=1, Number of Outputs=1, Number of Pins=4, Thickness=1.6mm, Width=3.5mm
U1A: "Transimpedance Amplifiers Programmable gain, differential output high-speed transimpedance amplifier 16-VQFN -40 to 125", Manufacturer_Name="Texas Instruments", Mouser Part Number=595-LMH32401IRGTR, Arrow Part Number=LMH32401IRGTR, Arrow Price/Stock=https://www.arrow.com/en/products/lmh32401irgtr/texas-instruments?region=nac, Datasheet Link=https://www.ti.com/lit/ds/symlink/lmh32401.pdf?ts=1646040631678&ref_url=https%253A%252F%252Fwww.ti.com%252Fstore%252Fti%252Fen%252Fp%252Fproduct%252F%253Fp%253DLMH32401IRGTR, Geometry.Height=1mm, Manufacturer_Part_Number=LMH32401IRGTR, Mouser Price/Stock=https://www.mouser.co.uk/ProductDetail/Texas-Instruments/LMH32401IRGTR?qs=Cb2nCFKsA8pHSvnjXGe4%252BA%3D%3D
U1C: library part CMP-09116-000032-1, "IC OPAMP VGA 1 CIRCUIT 16LFCSP", Manufacturer="Analog Devices", Max Junction Temp=+150°C, Max Supply Voltage=5V, Min Supply Voltage=3V, Nominal Supply Current=3-6mA, Output Current per Channel=5mA, Package=CP-16-22, Temperature="-40°C to +85°C", Temperature Range High=+85°C, Temperature Range Low=-40°C, Voltage Gain=80dB, Automotive=No, Bandwidth=18MHz, Category=IC, ComponentLink2Description=Datasheet, ComponentLink2URL=https://www.analog.com/media/en/technical-documentation/data-sheets/AD8338.pdf, Device Class L1="Integrated Circuits (ICs)", Device Class L2="Linear ICs", Device Class L3="Amplifiers - Op Amps", Digikey Description="IC OPAMP VGA 1 CIRCUIT 16LFCSP", Height=0.8mm, Ipc Land Pattern Name=QFN50P300X300X75-16, Lead Free=Yes, Manufacturer Part Number=AD8338ACPZ-R7, Mouser Description="Special Purpose Amplifiers Ultra Low Pwr 18MHz SGL CH VGA", Number of Channels=1, Octopart=https://octopart.com/ad8338acpz-r7-analog+devices-21054770, RoHS=TRUE
U2: library part CMP-0065-00037-3, "Switched Capacitor Voltage Converter, 8-pin Narrow SOIC, Pb-Free", Manufacturer="Texas Instruments", PackageTopMarking=NSZXTT*LM26*63M, PowerWise=N, Code_IPC=SOIC127P600-8, Code_JEDEC=MS-012-AA, ComponentLink1Description="Datasheet URL", ComponentLink1URL=http://www.ti.com/general/docs/lit/getliterature.tsp?genericPartNumber=LM2663&fileType=pdf, CompType="Switch Caps", PackageDescription="SOIC Narrow, 4.9 x 3.9 x 1.45mm, 8 Lead, 1.27mm Pitch", PackageReference=D0008A, PinCount=8, RoHS=Y
U2C: library part CMP-00370-145533195-1, "OPA863ADBVR Single-channel, high-precision, low-power, 105-MHz, 12-V RRIO voltage-feedback amplifier 5-SOT-23 -40 to 125", Ambient Temperature Range High=125°C, Case/Package=SOT-23, Input Bias Current=300nA, Input Offset Voltage (Vos)=10µV, Manufacturer Lifecycle Status=ACTIVE, Max Junction Temperature (Tj)=150°C, Max Supply Voltage=12.6V, Min Operating Temperature=-40°C, Min Supply Voltage=2.7V, Nominal Supply Current=800µA, Output Current per Channel=30mA, Voltage Gain=128dB, Bandwidth=105MHz, Height=1.45mm, Length=2.9mm, Lifecycle Status=Production, Max Operating Temperature=125°C, NexarPartId=145533195, Number of Channels=1, Number of Pins=5, Response Time=70ns, Thickness=1.2mm, Width=1.6mm
U5: library part CMP-00370-106221451-1, "TPS7A2433DBVR 200-mA, 18-V, ultra-low-IQ, low-dropout (LDO) voltage regulator with enable ; 5-SOT-23 -40 to 125", Case/Package=SOT-23, Manufacturer Lifecycle Status=ACTIVE, Output Voltage=3.3V, Height=1.45mm, Length=2.9mm, Lifecycle Status=Production, NexarPartId=106221451, Number of Channels=1, Number of Pins=5, Thickness=1.2mm, Width=1.6mm

## Free pads (board coordinates)
  round 5 hole 2.4: 3(46,4) 3(46,50.6) 3(63.5,11.8) 3(63.5,42.8) 3(81,4) 3(81,50.6)
  round 1.905 hole 1: 4(67.31,27.3)
  round 1.905 hole 1.016: 7(44.466,34.5)

## Via types
v1: diameter 0.6, hole 0.3, Top Layer to Bottom Layer, 93 vias

## Nets (pads, with @x,y where several pads share a name; then routed paths per layer and width w, separated by ;. In a path a pad name is that pad's centre, name@x,y a point inside that pad or via, vN(x,y) a via of type N, cw(c..) or ccw(c..) an arc to the next point about the centre after c; other vN are vias at no path point)
+3.3V: C1A.1 C2A.1 C3A.1 C4A.1 C15.2 J2.1 J3.3 R2A.1 R3A.3 U1A.2 U1A.14 U5.5 | length 134.3
  Top Layer w0.5: v1(57.896,36.945) 57.896,47.707 58.189,48 72.497,48 72.79,47.707 72.79,20.733 72.497,20.44 R2A.1
  Bottom Layer w0.3: U1A.14 C3A.1 ; U1A.2 57.707,27.8 57.883,27.976 C1A.1@57.883,29.524
  Bottom Layer w0.5: U5.5 C15.2 47,36.945 ; R3A.3 47.006,36.95 47,36.945 ; C3A.1 47.293,31.335 47,31.628 47,36.945 ; C1A.1 C2A.1 57.896,36.945 J3.3 47,36.945 ; R2A.1 J2.1
+5V: ADC.1 C1C.1 C1F.1 C2C.1 C2F.1 C3C.1 C4.2 C4C.1 C10.2 C14.2 RC4.2 RC4.3 U1.2 U1.4 U1C.15 U2.8 U2C.5 U5.1 U5.3 | length 133.1
  Top Layer w0.5: v1(19.105,14.3) 19.931,13.474 v1(28.384,13.474) ; v1(39.463,18.05) v1(43.773,18.05) v1(46.2,18.05)
  Bottom Layer w0.25: v1(28.384,13.474) U2C.5 C4C.1 C4C.1@30.25,11.1
  Bottom Layer w0.3: U1C.15 v1(43.773,18.05)
  Bottom Layer w0.5: C4.2 U1.4 ; ADC.1 C2F.1 v1(19.105,14.3) 19.105,35.424 ; U1.2 U1.4 ; U2.8 C14.2 ; U5.3 U5.3 14.397,38.843 C14.2 ; RC4.2 RC4.3 39.463,35.132 39.17,35.424 19.105,35.424 ; v1(39.463,18.05) RC4.3@39.463,33.695 ; U1.4 C10.2 ; C10.2 U5.1 19.105,35.424 ; C10.2 C14.2
-5V: C12.2 C13.2 J1.3 U2.5 | length 60.7
  Bottom Layer w0.5: U2.5 C13.2 C12.2 67.017,46.223 67.31,45.93 J1.3
ADC_IN: ADC.3 J4.1 | length 24.6
  Bottom Layer w0.3: ADC.3 6.475,9.759 24.558,9.759 24.733,9.934 J4.1
AGC_N: DIFF.1 R5C.2 U1C.10 | length 7.9
  Bottom Layer w0.3: R5C.2 35.983,14.348 36.159,14.524 37.535,14.524 37.99,14.524 39,13.514 DIFF.1 40.02,14.524 U1C.10
AGC_P: DIFF.2 R4C.2 U1C.11 | length 7.9
  Bottom Layer w0.3: R4C.2 35.983,15.2 36.159,15.024 37.742,15.024 37.99,15.024 39,16.034 DIFF.2 40.02,15.024 U1C.11
BPF_N: C1B.2 C3B.2 R3B.1 U1C.4 | length 8.4
  Bottom Layer w0.3: U1C.4 R3B.1 C1B.2
BPF_P: C2B.2 C3B.1 R4B.2 U1C.1 | length 10.9
  Top Layer w0.3: v1(48.239,15.524) 49.739,14.024 v1(51.639,14.024)
  Bottom Layer w0.3: U1C.1 v1(48.239,15.524) ; v1(51.639,14.024) C2B.2
CS_PD: ADC.6 P9.37 | length 11.1
  Bottom Layer w0.3: ADC.6 4.505,6.462 5.135,5.832 5.135,3.81 5.903,3.041 10.215,3.041 P9.37
GAIN_OUT: J4.3 J5.2 R6C.1 U2C.1 | length 23.3
  Bottom Layer w0.3: U2C.1 J4.3 27.273,9.935 27.449,9.759 R6C.1 34.383,8.158 J5.2
GND: 5V.1 ADC.2 C1.2 C1A.2 C1C.2 C1E.2 C1F.2 C2.2 C2A.2 C2C.2 C2F.2 C3.1 C3A.2 C3C.2 C4.1 C4A.2 C4C.2 C5A.1 C5C.1 C6A.2 C6C.1 C7A.2 C8A.1 C9A.2 C10.1 C12.1 C13.1 C14.1 C15.1 GND.1 J0.2 J0.3 J1.2 J2.3 J3.1 J5.1 P9.23 P9.24 P9.25 P9.26 R2A.3 R2C.2 R3A.1 R5B.1 R7C.1 R8C.1 U1.1 U1A.1 U1A.6 U1A.7 U1A.17 U1C.5 U1C.17 U2.1 U2.3 U2.6 U2C.2 U5.2
  other v1: 2,6.829 2,7.829 2,8.829 9.823,8.865 11.223,8.865 12.623,8.865 14.023,8.865 15.423,8.865 16.823,8.865 18.223,8.865 19.623,8.865 21.023,8.865 22.475,8.865 23.875,8.864 25.275,8.864 26.675,8.864 28.075,8.864 29.528,8.864 30.928,8.864 32.328,8.864 2,9.829 8.433,10.653 9.833,10.653 11.233,10.653 12.633,10.653 14.033,10.653 15.433,10.653 16.833,10.653 18.233,10.653 19.633,10.653 21.033,10.653 22.486,10.653 23.886,10.653 25.975,10.653 28.086,10.653 54.198,11.339 54.198,12.739 41.05,13.021 45.996,13.021 54.198,14.139 43.523,14.774 54.198,15.539 41.05,16.527 45.996,16.527 54.198,16.939 54.198,18.392 30.13,18.538 31.583,18.538 32.983,18.538 54.199,19.792 54.199,21.192 47.616,21.545 36.923,21.684 47.616,22.945 36.923,23.137 47.616,24.398 36.923,24.59 47.617,25.798 36.923,25.99 47.617,27.198 54.34,27.55 56.4,31.436 23.778,32.121 25.178,32.121 26.578,32.121 28.031,32.121 56.4,32.436 69.615,32.745 56.4,33.436 2,33.915 62,34.145 69.615,34.145 56.4,34.436 2,34.915 62,35.545 69.615,35.545 2,35.915 2,36.915 62,36.945 69.615,36.945 62,38.345 23.778,41.808 25.178,41.808 26.578,41.808 27.978,41.808
LNA_N: R1B.2 U1A.11 | length 7.9
  Bottom Layer w0.3: R1B.2 49.814,22.624 50.354,23.164 50.354,27.624 50.53,27.8 U1A.11
LNA_P: R2B.2 U1A.10 | length 6.7
  Bottom Layer w0.3: R2B.2 51.564,22.624 51.024,23.164 51.024,27.124 51.199,27.3 U1A.10
LPF_IN: J4.4 R1E.2 | length 2.3
  Bottom Layer w0.25: J4.4 27.273,20.89 R1E.2
LPF_OUT: C1E.1 J4.2 R1E.1 | length 6.5
  Bottom Layer w0.3: J4.2 C1E.1 R1E.1
MISO_PD: ADC.5 P9.40 | length 8.8
  Bottom Layer w0.3: ADC.5 5.455,8.453 5.631,8.629 8.769,8.629 8.945,8.453 P9.40
MODE: R7C.2 U1C.6 | length 2
  Bottom Layer w0.3: R7C.2 U1C.6
MOSI_PD: ADC.4 P9.42 | length 3.1
  Bottom Layer w0.3: P9.42 ADC.4
NetC1B_1: C1B.1 R1B.1 | length 1.8
  Bottom Layer w0.3: C1B.1 R1B.1
NetC2B_1: C2B.1 R2B.1 | length 1.8
  Bottom Layer w0.3: C2B.1 R2B.1
NetC5A_2: C5A.2 pad.7 R3A.2 U1A.12 | length 22
  Top Layer w0.3: pad.7@44.466,34.608 pad.7@44.574,34.5
  Top Layer w0.5: pad.7@44.466,34.608 R3A.2
  Bottom Layer w0.3: pad.7 44.466,28.476 44.642,28.3 49.739,28.3 U1A.12
NetC5C_2: C5C.2 R2C.1 R3C.2 RC4.1 | length 17.4
  Bottom Layer w0.3: C5C.2 R3C.2 ; RC4.1@34.383,33.695 R3C.2 ; R2C.1 R3C.2
NetC6A_1: C6A.1 J3.2 U1A.16 | length 11.7
  Bottom Layer w0.3: U1A.16 55.09,29.3 C6A.1
  Bottom Layer w0.5: J3.2 C6A.1
NetC6C_2: C6C.2 U1C.7 U1C.8 | length 4.3
  Bottom Layer w0.3: C6C.2 U1C.8 U1C.7
NetC7A_1: C7A.1 R2A.2 U1A.9 | length 10.5
  Bottom Layer w0.3: U1A.9 C7A.1 52.84,24.292 53.09,24.042 53.165,24.042 56.636,20.571 R2A.2
NetC8A_2: C8A.2 J1.1 R1A.2 | length 3.9
  Bottom Layer w0.5: R1A.2 J1.1
NetC9A_1: C9A.1 J2.2 U1A.5 | length 5.3
  Bottom Layer w0.3: U1A.5 C9A.1 ; J2.2 C9A.1@57.906,26.04
NetC11_1: C11.1 U2.2 | length 4.6
  Bottom Layer w0.5: C11.1 U2.2
NetC11_2: C11.2 U2.4 | length 6.3
  Bottom Layer w0.5: C11.2 8.652,46.223 8.945,45.93 U2.4
NetPD_1: PD.1 U1A.3 | length 6.4
  Bottom Layer w0.3: U1A.3 PD.1
NetPD_2: pad.4 PD.2 R1A.1 | length 8.4
  Bottom Layer w0.5: PD.2 pad.4 R1A.1@67.31,33.2
NetR3B_2: R3B.2 R4B.1 R5B.2 | length 3.7
  Bottom Layer w0.3: R5B.2 R3B.2 R4B.1
NetR3C_1: R3C.1 R4C.1 U2C.3 | length 4.7
  Bottom Layer w0.3: U2C.3 32.18,16.044 R4C.1 R3C.1
NetR5C_1: R5C.1 R6C.2 U2C.4 | length 4.6
  Bottom Layer w0.3: U2C.4 32.18,13.504 34.383,13.504 R6C.2@34.383,11.1
OFSN: C7C.1 U1C.14 | length 3
  Bottom Layer w0.3: C7C.1 42.973,17.345 43.273,17.045 U1C.14
PS_ON: P9.44
VAGC: R8C.2 U1C.13 | length 8.2
  Bottom Layer w0.3: R8C.2@42.033,24.148 42.033,17.648 42.773,16.908 U1C.13
VCC: 5V.2 C1.1 C2.1 C3.2 J0.1 U1.3 | length 23.9
  Bottom Layer w0.5: C3.2 U1.3 6.645,26.107 C2.1 5V.2 J0.1
VREF: C7C.2 R8C.3 U1C.16 | length 5.5
  Bottom Layer w0.3: U1C.16 44.273,17.045 44.573,17.345 C7C.2 R8C.3@44.573,21.608
pads on no net: J1.4 P8.23 P8.24 P8.25 P8.26 P8.27 P8.28 P8.29 P8.30 P8.31 P8.32 P8.33 P8.34 P8.35 P8.36 P8.37 P8.38 P8.39 P8.40 P8.41 P8.42 P8.43 P8.44 P8.45 P8.46 P9.27 P9.28 P9.29 P9.30 P9.31 P9.32 P9.33 P9.34 P9.35 P9.36 P9.38 P9.39 P9.41 P9.43 P9.45 P9.46 U1A.4 U1A.8 U1A.13 U1A.15 U1C.2 U1C.3 U1C.9 U1C.12 U2.7 U5.4

## Polygon pours and split planes (outlines as drawn)
GND on Top Layer "GND_L01_P014" (solid, pour order 14): 0.5,0.5 0.5,54.1 84.5,54.1 84.5,0.5
GND on Bottom Layer "GND_L02_P013" (solid, pour order 13): 0.5,0.5 0.5,54.1 84.5,54.1 84.5,0.5

## Other copper
Multi-Layer:
  pour cut-out: 49.114,16.019 49.114,13.529 44.426,13.529 44.426,16.019
  pour cut-out: 52.264,27.05 52.264,11.774 49.114,11.774 49.114,27.05
  pour cut-out: 61.128,26.197 61.128,28.402 68.412,28.402 68.412,26.197
  pour cut-out: 55.29,27.05 55.29,27.55 61.128,27.55 61.128,27.05
  pour cut-out: 66.246,26.197 66.246,37.695 68.412,37.695 68.412,26.197
  pour cut-out: 53.39,28.05 53.39,27.05 49.114,27.05 49.114,28.05

## Silkscreen, mask and mechanical layers (free items; w line width, h text height)
Top Overlay:
  circle w0.254: c64.77,27.3 r4.6
  lines w0.15: 61.128,25.547 61.128,29.053
  text "+3.3V" at 58.552,36.686 h0.5
  text "K" at 61.932,21.982 h0.8
  text "A" at 67.063,21.982 h0.8
  text "LPF_OUT" at 22.502,20.412 h0.5
  text "LPF_IN" at 26.247,20.412 h0.5
  text "+5V" at 17.073,14.05 h0.5
  text "ADC_IN" at 22.715,13.897 h0.5
  text "GAIN_OUT" at 25.954,13.897 h0.5
  text "GND" at 30.634,4.953 h0.5 r270
  text "OpenVLC_RX_2.6" at 57.641,4.426 h0.8
  text "IMDEA Networks" at 57.641,2.995 h0.8
Bottom Overlay:
  text "-5V" at 21.695,47.187 h0.5
  text "-5V" at 67.065,41.277 h0.5 r270
  text "VOCM_SET" at 42.699,39 h0.5 r270
  text "GND" at 71.335,38.605 h0.5
  text "+3.3V" at 60.8,36.687 h0.5
  text "VOCM" at 45.493,35.819 h0.5
  text "20k" at 47.85,35.813 h0.5 r270
  text "2k" at 47.85,34.73 h0.5 r270
  text "+5V" at 20.998,33.937 h0.5
  text "GAIN" at 50.882,32.818 h0.5
  text "DC_OFFSET" at 42.272,31.538 h0.5 r270
  text "GND" at 12.263,28 h0.5 r270
  text "AGC_SET" at 48.5,24.381 h0.5 r270
  text "ON" at 55.6,23 h0.5
  text "OFF" at 61.525,23 h0.5
  text "ALC" at 58.541,21.543 h0.5
  text "VOD_SET" at 54.876,16.472 h0.5 r270
  text "GAIN_OUT" at 39.638,0.68 h0.5
  text "GND" at 41.461,0.68 h0.5
Mechanical 1:
  the board outline again, w0.254

## Text inside footprints (layer, text, board x,y; h text height)
C2: Bottom Overlay "+" at 8.424,26.615 h1.2 r180
C11: Bottom Overlay "+" at 4.829,40.037 h1.2 r90
C12: Bottom Overlay "+" at 18.039,43.116 h1.2 r90